# Altium PCB MOTOR_MAQUINA.PcbDoc
Units mm, origin at the board's own origin, x right, y up, seen from the top; angles counter-clockwise.
Board outline 50.93 x 27.65 mm, 2 copper layers (Top Layer, Bottom Layer); 14 components, 13 nets, 42 pads, 0 vias.
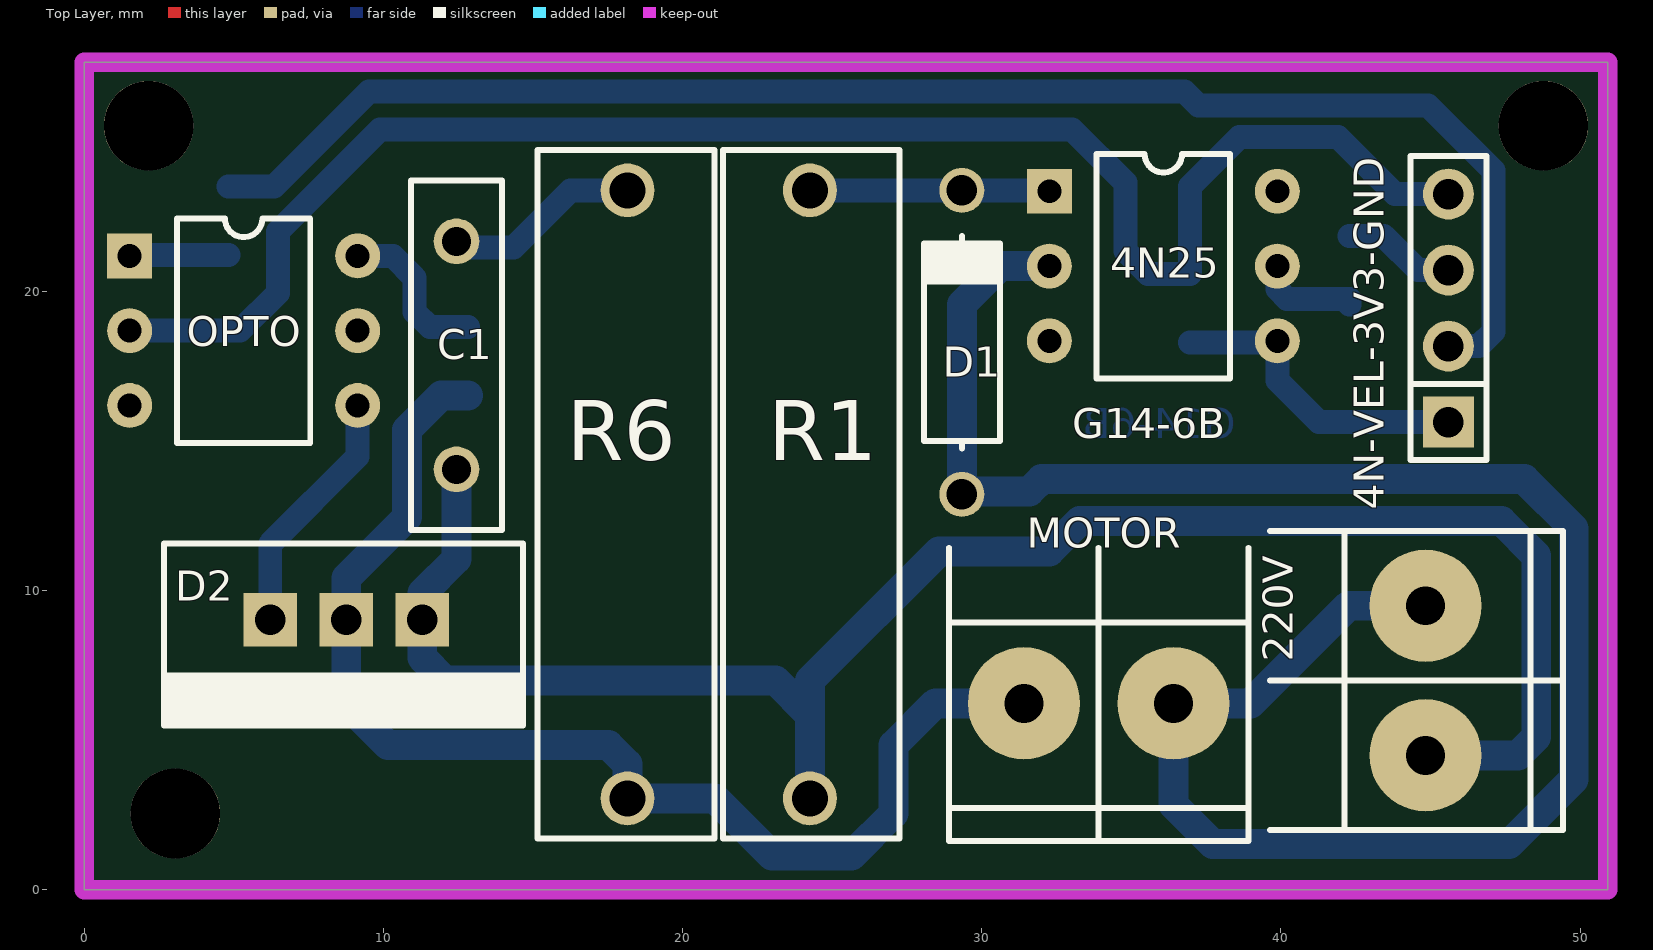
[diagram p0: Top Layer view]
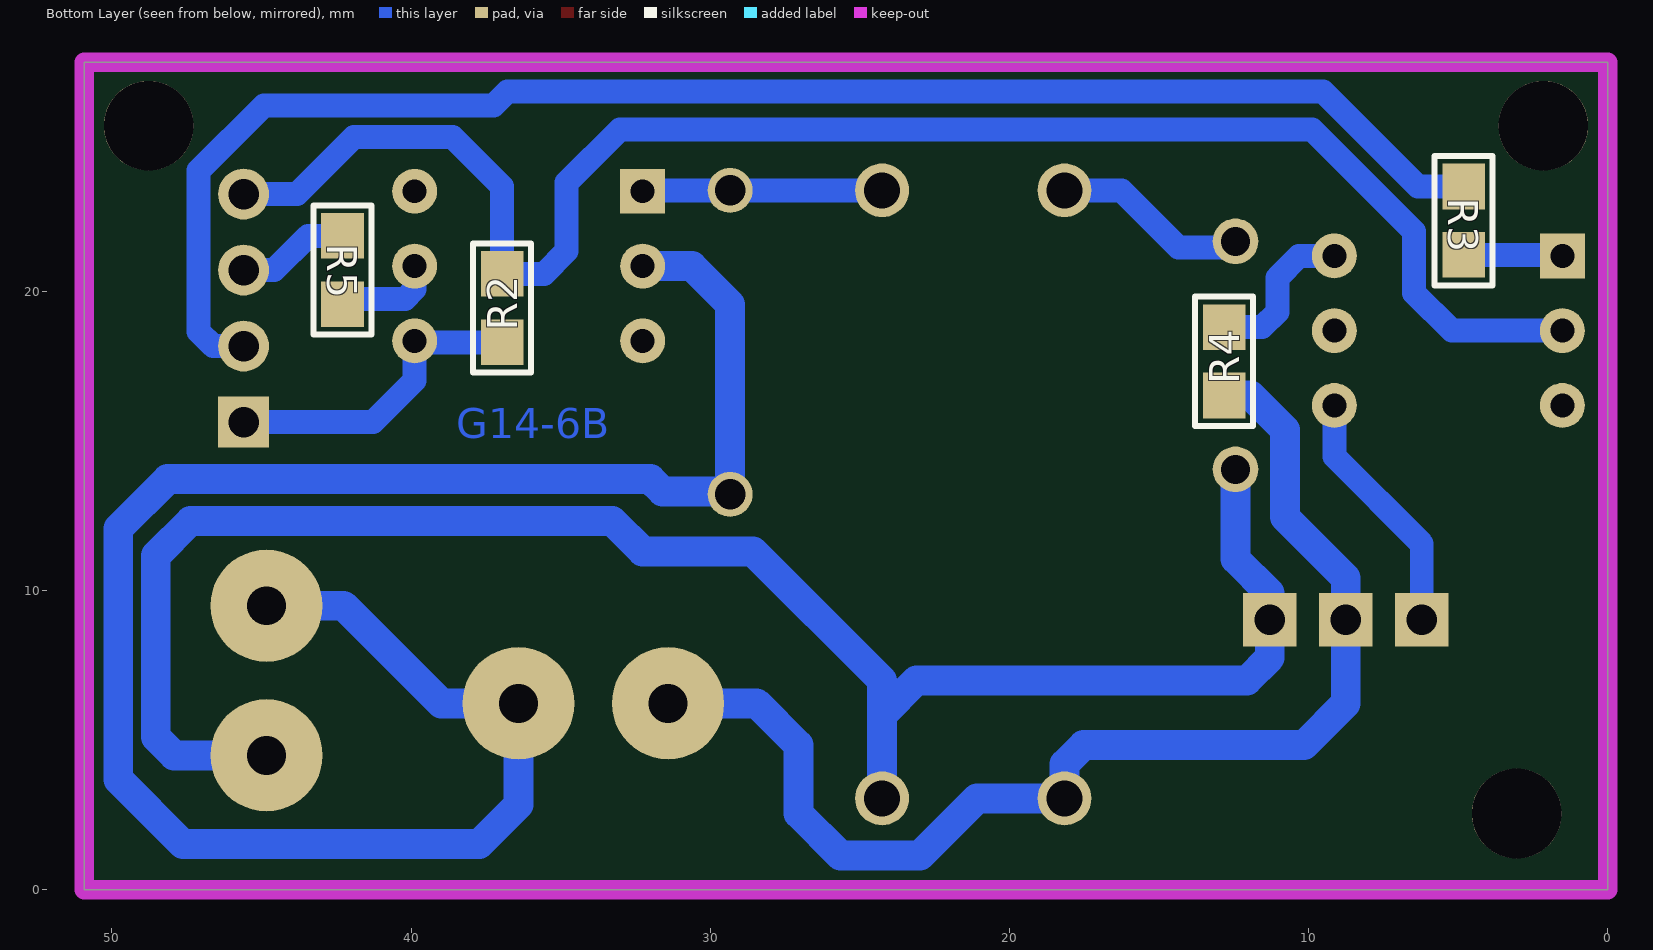
[diagram p1: Bottom Layer view, seen from below]
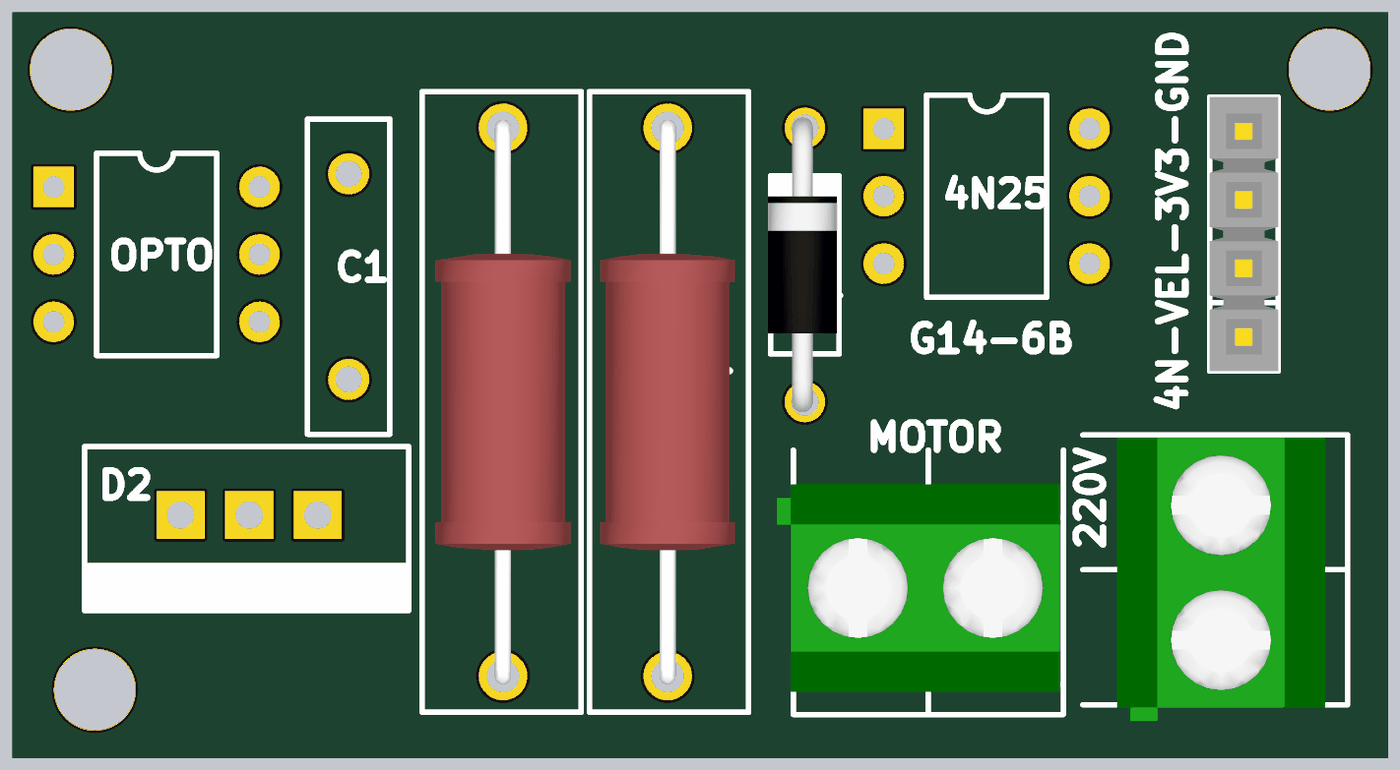
[diagram p2: 3D render of the assembled board from above, using the file's embedded part models]
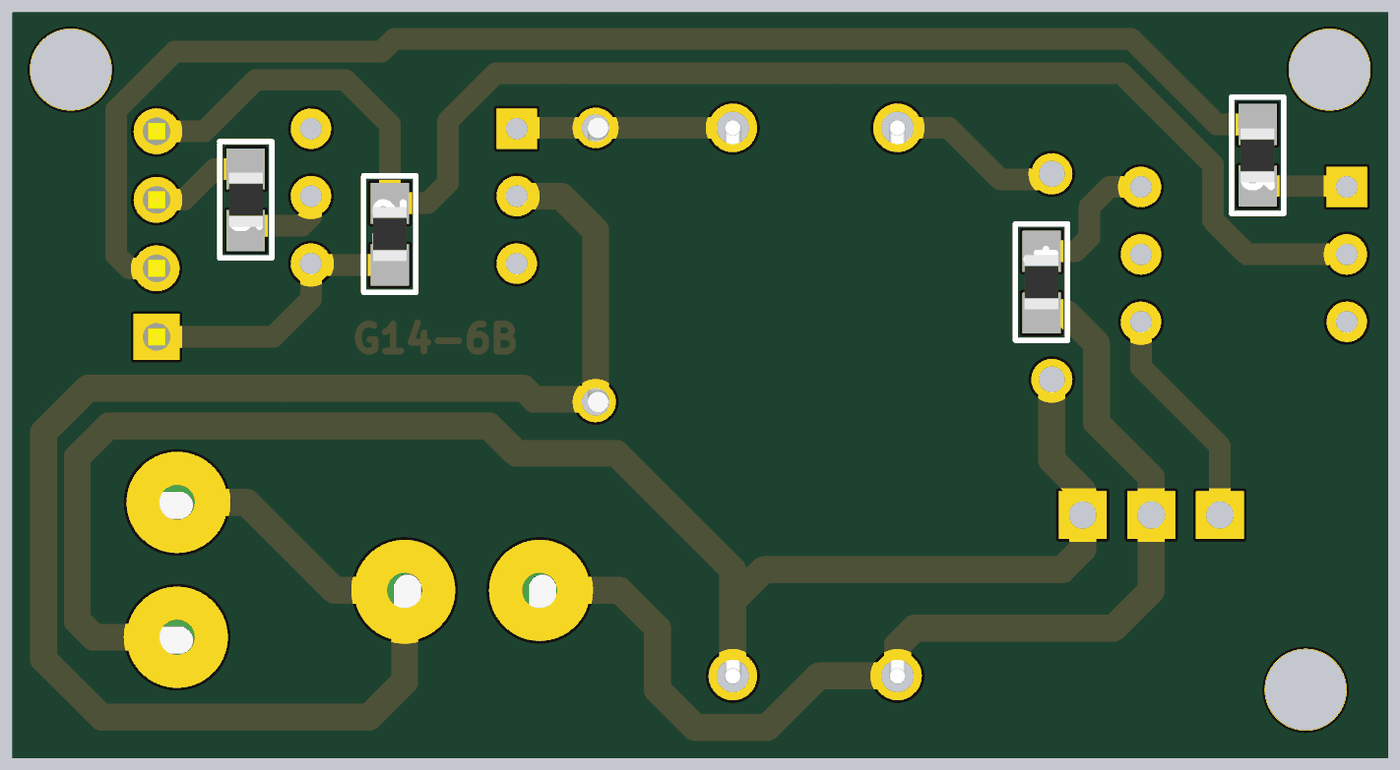
[diagram p3: 3D render of the assembled board from below, using the file's embedded part models]

## Layer stack, top to bottom
Top Solder: solder mask 0.0102, Solder Resist, Dk 3.5
Top Layer: signal copper 0.0356
Dielectric 1: dielectric 0.32, FR-4, Dk 4.8
Bottom Layer: signal copper 0.0356
Bottom Solder: solder mask 0.0102, Solder Resist, Dk 3.5

## Board outline
0,0 0,27.654 50.927,27.654 50.927,0

## Design rules (kind name [scope] priority, off if disabled: settings)
Clearance Clearance_Polygon [InNamedPolygon('Polygon')] p1: gap=1 ignorepadtopadclearanceinfootprint=FALSE except(0: Arc-Hole Track-Hole SMDPad-Hole THPad-Hole Via-Hole Fill-Hole Poly-Hole Region-Hole Text-Hole)
Clearance [All] p2: gap=0.254 ignorepadtopadclearanceinfootprint=FALSE except(0: Arc-Hole Track-Hole SMDPad-Hole THPad-Hole Via-Hole Fill-Hole Poly-Hole Region-Hole Text-Hole)
ComponentClearance ComponentClearance_KL25z [InComponent('J11')] p1: gap=0 collisioncheckmode=3 verticalgap=0 showdistances=FALSE
ComponentClearance [All] p2: gap=0.254 collisioncheckmode=3 verticalgap=0.254 showdistances=FALSE
PolygonConnect [All] p1: connectstyle=Relief reliefconductorwidth=0.254 reliefentries=4 polygonreliefangle="90 Angle" airgapwidth=0.254
RoutingVias [All] p1: holewidth=0.711 width=1.27 viastyle="Through Hole" minholewidth=0.711 minwidth=1.27 maxholewidth=0.711 maxwidth=1.27
SolderMaskExpansion [All] p1: expansion=0.102
Width [All] p1: maxlimit=1 minlimit=0.8 preferedwidth=0.8 toplayer_maxwidth=0.8 minimp=50.000000 maximp=50.000000 favimp=50.000000
29 further rules are at their usual default settings.

## Components (designator, comment, footprint, x,y, rotation, side; value= is the part's Value field where it differs from the comment)
4N25 "4N25" DIP6 32.258,23.336 r0 top (schematic designator J4)
4N-VEL-3V3-GND "CON4" SIP4 45.593,19.431 r90 top (schematic designator J5)
220V "220" BORNERA2 44.831,6.985 r180 top (schematic designator J2)
C1 "33n" CAP300 12.446,21.663 r270 top
D1 "1N4006" DO41 29.337,18.288 r90 top
D2 "TRIAC" "TO-220 V" 8.763,9.017 r180 top
MOTOR "MOTOR" BORNERA2 33.909,6.223 r90 top (schematic designator J1)
OPTO "OPTOTRIAC" DIP6 1.524,21.177 r0 top (schematic designator J3)
R1 "15K" "R Axial 0.8" 24.257,13.208 r90 top
R2 "10K" 0805 36.957,19.431 r270 bottom
R3 "220" 0805 4.826,22.352 r90 bottom
R4 "220" 0805 12.827,17.653 r90 bottom
R5 "2.2" 0805 42.291,20.701 r270 bottom
R6 "33" "R Axial 0.8" 18.161,13.208 r270 top

## Footprints (in the part's own frame and the unit in brackets; to place one, negate y for a bottom-side part, rotate by r counter-clockwise, add the part's x,y. Pads: shape width x height; smd on the part's side, far side on the other; paste and mask are expansions set on the pad)
0805 [mil] "Pasivo 0805"
  rect 60x56 smd: 1(-45,0) 2(45,0)
  silkscreen extent -85,-38 85,38, body extent -39,-25 39,25, height 15
BORNERA2 [mm] "Bornera con Tornillos 5mm separación"
  round 3.75 hole 1.3: 1(0,2.5) 2(0,-2.5)
  silkscreen extent -4.6,-5 5.2,5, body extent -3.76,-4.89 3.94,5.61, height 10
CAP300 [mil]
  round 60 hole 38: 1(0,0) 2(300,0)
  silkscreen extent -80,-60 380,60
DIP6 [mm]
  rect 1.5x1.5 hole 0.8: 1(0,0)
  round 1.5 hole 0.8: 2(0,-2.5) 3(0,-5) 4(7.62,-5) 5(7.62,-2.5) 6(7.62,0)
  silkscreen extent 1.58,-6.25 6.04,1.25
DO41 [mm]
  round 1.5 hole 1.016: 1(-5.08,0) 2(5.08,0)
  silkscreen extent -3.56,-1.27 3.56,1.27, body extent -5.46,-1.19 5.46,1.37, height 2.03
"R Axial 0.8" [mm] "Resistor Axial 800 mils"
  round 1.8 hole 1.2: 1(-10.16,0) 2(10.16,0)
  silkscreen extent -11.5,-3 11.5,2.9, body extent -10.46,-2.48 10.46,2.5, height 5
SIP4 [mm]
  rect 1.7x1.7 hole 1.016: 1(-3.81,0)
  round 1.7 hole 1.016: 2(-1.27,0) 3(1.27,0) 4(3.81,0)
  silkscreen extent -5.08,-1.27 5.08,1.27, body extent -5.08,-1.27 5.08,1.27, height 8.38
"TO-220 V" [mil]
  rect 70x70 hole 40: 1(-100,0) 2(0,0) 3(100,0)
  silkscreen extent -232,-100 240,139, body extent -197,-79 197,118, height 709

## Part data
220V MOTOR: library part "BORNERA 2"
C1: library part CAP
D1: library part DIODO
R1 R2 R3 R4 R5 R6: library part RES

## Free pads (board coordinates)
  round 3 hole 3: 0(2.159,25.527) 0(3.048,2.54) 0(48.768,25.527)

## Nets (pads, with @x,y where several pads share a name; then routed paths per layer and width w, separated by ;. In a path a pad name is that pad's centre, name@x,y a point inside that pad or via, vN(x,y) a via of type N, cw(c..) or ccw(c..) an arc to the next point about the centre after c; other vN are vias at no path point)
3V3: 4N25.5 R5.2 | length 3.5
  Bottom Layer w0.8: 4N25.5 39.878,20.066 40.204,19.74 42.291,19.74 R5.2
4NKL: 4N25.4 4N-VEL-3V3-GND.1 R2.2 | length 10.5
  Bottom Layer w0.8: R2.2 4N25.4@39.83,18.288 ; 4N25.4 39.878,17.018 41.275,15.621 4N-VEL-3V3-GND.1
+: 220V.1 C1.2 D2.1 R1.1 | length 61.2
  Bottom Layer w1: C1.2@12.446,13.843 12.446,11.049 11.303,9.906 D2.1 11.303,7.747 12.065,6.985 23.114,6.985 24.257,5.842 ; R1.1 24.257,5.842 ; 220V.1 47.919,4.485 48.53,5.096 48.53,11.16 47.371,12.319 33.274,12.319 32.258,11.303 28.575,11.303 24.257,6.985 24.257,5.842
-: 4N25.2 220V.2 D1.1 MOTOR.2 | length 67.5
  Bottom Layer w1: 4N25.2 30.615,20.836 29.337,19.558 D1.1 29.437,13.308 31.596,13.308 32.004,13.716 48.133,13.716 49.784,12.065 49.784,3.683 47.625,1.524 37.719,1.524 36.409,2.834 MOTOR.2 38.989,6.223 42.251,9.485 220V.2
GND: 4N-VEL-3V3-GND.4 OPTO.2 R2.1 | length 55.8
  Bottom Layer w0.8: OPTO.2 5.215,18.677 6.477,19.939 6.477,21.99 9.887,25.4 33.02,25.4 34.798,23.622 34.798,21.336 35.56,20.574 R2.1 36.957,23.495 38.608,25.146 41.91,25.146 43.815,23.241 4N-VEL-3V3-GND.4
M1: D2.2 MOTOR.1 R4.1 R6.2 | length 41.4
  Bottom Layer w1: R4.1 11.938,16.51 10.795,15.367 10.795,12.446 8.763,10.414 D2.2 8.763,6.223 10.16,4.826 17.526,4.826 18.161,4.191 R6.2 21.082,3.048 22.987,1.143 25.654,1.143 27.051,2.54 27.051,4.826 28.448,6.223 MOTOR.1
NetC1_1: C1.1 R6.1 | length 6.5
  Bottom Layer w0.8: C1.1@12.446,21.463 14.351,21.463 16.256,23.368 R6.1
NetD1_2: 4N25.1 D1.2 R1.2 | length 8
  Bottom Layer w0.8: R1.2 D1.2 4N25.1@32.226,23.368
NetD2_3: D2.3 OPTO.4 | length 8.4
  Bottom Layer w0.8: D2.3 6.223,11.557 9.144,14.478 OPTO.4
NetJ3_1: OPTO.1 R3.1 | length 3.3
  Bottom Layer w0.8: OPTO.1@1.556,21.209 R3.1
NetJ3_6: OPTO.6 R4.2 | length 5.3
  Bottom Layer w0.8: OPTO.6 10.319,21.177 11.049,20.447 11.049,19.304 11.557,18.796 R4.2
NetJ5_3: 4N-VEL-3V3-GND.3 R5.1 | length 3.8
  Bottom Layer w0.8: R5.1 43.434,21.844 44.577,20.701 4N-VEL-3V3-GND.3
VEL: 4N-VEL-3V3-GND.2 R3.2 | length 51.8
  Bottom Layer w0.8: R3.2 6.35,23.495 9.525,26.67 36.779,26.67 37.249,26.2 44.92,26.2 47.097,24.023 47.097,18.649 46.609,18.161 4N-VEL-3V3-GND.2
pads on no net: 4N25.3 4N25.6 OPTO.3 OPTO.5

## Keep-outs
Keep-Out Layer:
  the board outline again, w0.65

## Other copper
Bottom Layer:
  text "G14-6B" at 38.481,15.081 h1

## Silkscreen, mask and mechanical layers (free items; w line width, h text height)
Top Overlay:
  text "G14-6B" at 33.02,15.081 h1